# Altium PCB uku20710_com (1).PcbDoc (part 1 of 4)
Units mm, origin at the board's own origin, x right, y up, seen from the top; angles counter-clockwise.
Board outline 354.7 x 156.7 mm, 2 copper layers (Top Layer, Bottom Layer); 275 components, 514 nets, 980 pads, 578 vias.
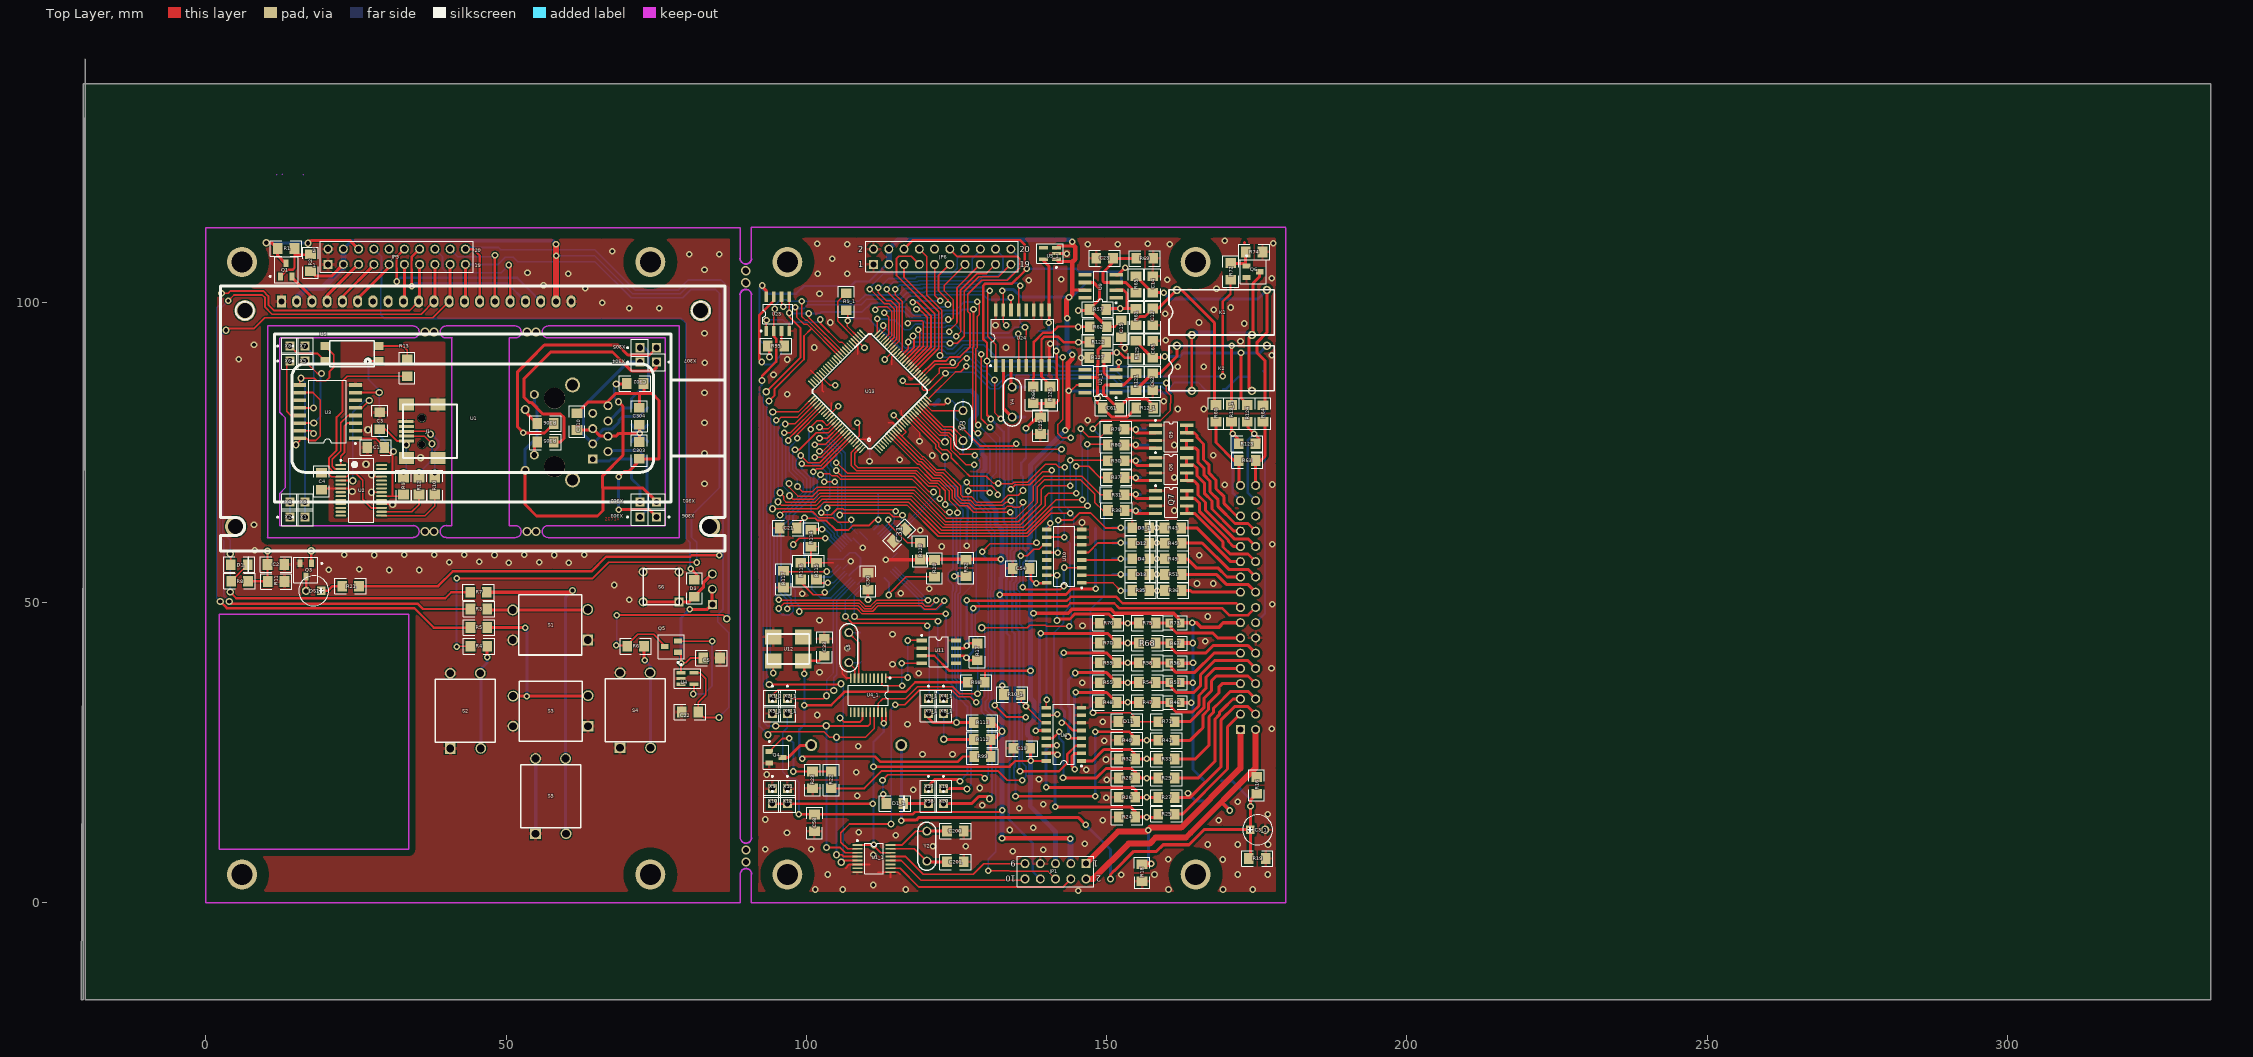
[diagram p0: Top Layer view]
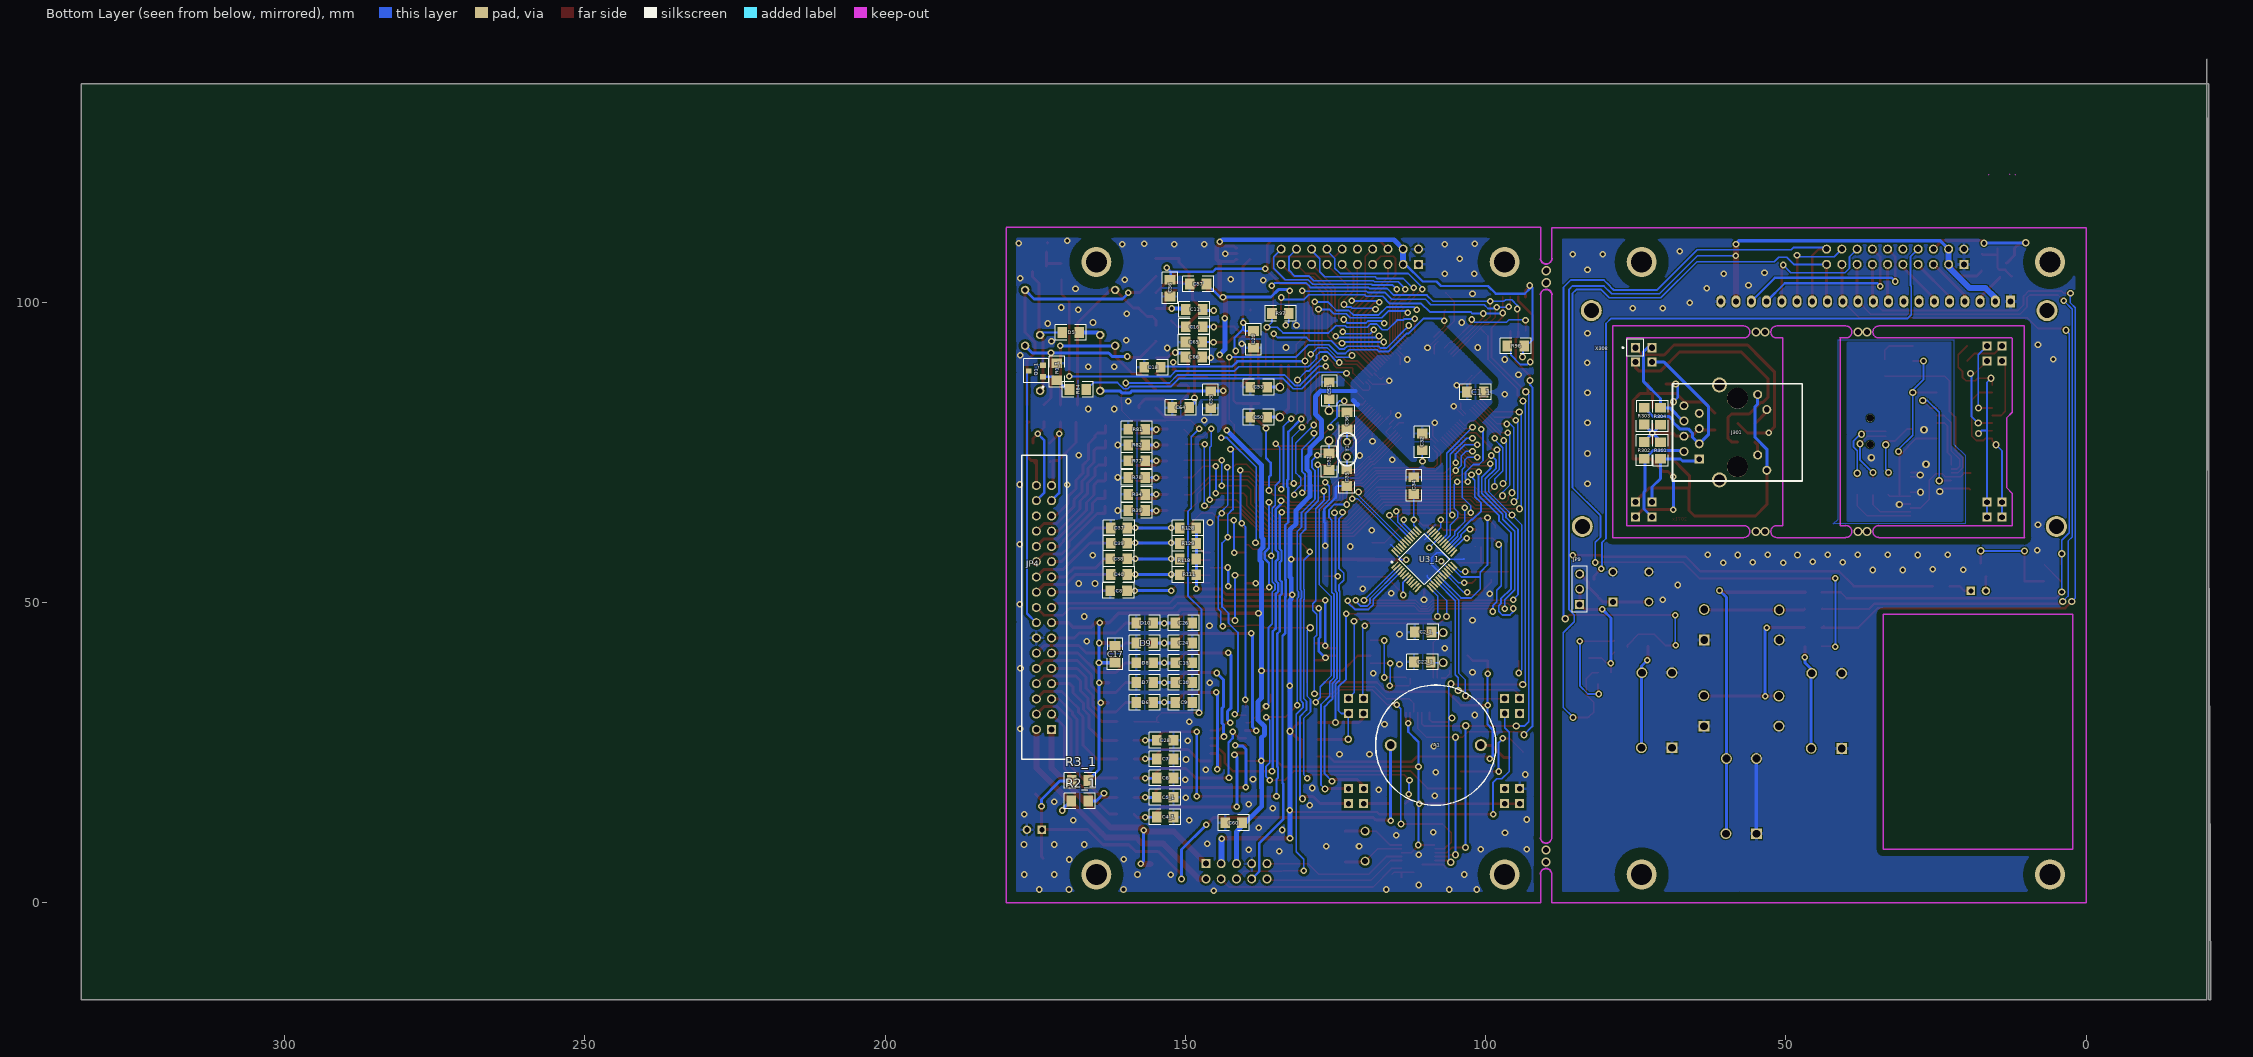
[diagram p1: Bottom Layer view, seen from below]

## Layer stack, top to bottom
Top Layer: signal copper 0.0356
Dielectric: dielectric 0.32, FR-4, Dk 4.8
Bottom Layer: signal copper 0.0356

## Board outline
-20.1,140.5 -20.1,-16.2 333.9,-16.2 333.9,136.35 -20.45,136.35 -20.45,-16.2 -20.8,-16.2

## Design rules (kind name [scope] priority, off if disabled: settings)
Clearance Keep_out_usb [OnLayer('Keep-Out Layer') vs InPoly and InNet(GND_USB)] p1: gap=0.3
Clearance Keep_out_poly [OnLayer('Keep-Out Layer') vs InPoly] p2: gap=1
Clearance Holes [InPoly vs HasPad('Free-0') Or HasPad('Free-1') Or HasPad('Free-2') Or HasPad('Free-3')] p3: gap=2
Clearance Keep_Out [OnLayer('Keep-Out Layer')] p4: gap=0.45
Clearance "Для разъёма и индикатора" [InComponent(JP5) or InComponent(U2)] p5: gap=0.3
Clearance [All] p6: gap=0.2
ComponentClearance [All] p1: gap=0.254 collisioncheckmode=0
HoleSize [All] p1: absolutevalues=TRUE maxlimit=5 minlimit=0.025 maxpercent=80.000 minpercent=20.000
PolygonConnect [InComponent(J1) and HasPad('J1-5')] p1: connectstyle=Relief reliefconductorwidth=0.3 reliefentries=4 polygonreliefangle="90 Angle"
PolygonConnect PolygonConnect_1 [All] p2: connectstyle=Relief reliefconductorwidth=0.5 reliefentries=4 polygonreliefangle="90 Angle"
RoomDefinition cpu_board [InComponentClass('cpu_board')] p1: confinementstyle=ConfineIn formatcopy=TRUE outline -43.128,-31.749 7.672,-31.749 7.672,-6.349 -43.128,-6.349
RoomDefinition ETHERNET [InComponentClass('ETHERNET')] p2: confinementstyle=ConfineIn formatcopy=TRUE outline -43.128,-31.749 7.672,-31.749 7.672,-6.349 -43.128,-6.349
RoomDefinition ANALOG-PART [InComponentClass('ANALOG-PART')] p3: confinementstyle=ConfineIn formatcopy=TRUE outline -43.128,-31.749 7.672,-31.749 7.672,-6.349 -43.128,-6.349
RoutingLayers [All] p1: top layer=Horizontal bottom layer=Vertical
RoutingVias [All] p1: holewidth=0.7 width=1.2 viastyle="Through Hole" minholewidth=0.6 minwidth=1.1 maxholewidth=0.7 maxwidth=1.2
SolderMaskExpansion [All] p1: expansion=0.102
TestPointUsage [All] p1: valid=0 allowmultiple=FALSE
Testpoint [All] p1: side=15 testpointundercomponent=TRUE minsize=1.016 maxsize=2.54 preferedsize=1.524 minholesize=0 maxholesize=1.016 preferedholesize=0.813 testpointgrid=0.025 style=1023 order=1234567890
Width [All] p1: maxlimit=2 minlimit=0.2 preferedwidth=0.254 toplayer_prefwidth=0.5 bottomlayer_prefwidth=0.5 minimp=50.000000 maximp=50.000000 favimp=50.000000
15 further rules are at their usual default settings.

## Classes and differential pairs
component class USB: C1 C3 C4 J1 R9 R10 R12 R13 U2 U3 U5 X1 X2 X3 X4 X5 X6 X7 X8
component class uku206: A? BT? C2 C5 C22 D1 D3 DS1 JP5 JP9 Q1 Q3 Q5 R1 R2 R3 R4 R5 R6 R7 R8 R11 R21 S1 S2 S3 S4 S5 S6 U1 U4 UU1 UU3 UU5 UU7 UU9
component class LAN: C302 C303 C304 C310 J301 R301 R302 R303 R304 R305 R306 X301 X302 X303 X304 X305 X306 X307 X308

## Components (designator, comment, footprint, x,y, rotation, side; value= is the part's Value field where it differs from the comment)
A1 "EFM260" Pjezo15 103.3,26.258 r0 bottom
C1 "1.0" _1206#1 28.307,75.819 r0 top
C1_1 "1.0" _1206#1 101.674,85.051 r180 bottom (schematic designator C1)
C2 "1.0" _1206#2 11.653,56.314 r180 top
C2_1 "Cap Semi" _1206#1 110.402,45.062 r180 bottom (schematic designator C2)
C3 "1.0" C3216-1206 28.957,80.27 r270 top
C3_1 "22.0 x 50" el3 173.874,12.151 r0 top (schematic designator C3)
C4 "1.0" C3216-1206 19.255,70.168 r90 top
C4_1 "1.0" _1206#3 153.374,14.251 r180 bottom (schematic designator C11)
C5 "1.0" _1206#1 84.197,40.76 r180 top
C5_1 "1.0" _1206#3 153.374,17.551 r180 bottom (schematic designator C5)
C6 "1.0" _1206#3 153.374,20.751 r180 bottom (schematic designator C7)
C7 "1.0" _1206#3 153.374,23.951 r180 bottom (schematic designator C13)
C8 "1.0" _1206#3 161.115,51.964 r0 bottom (schematic designator C?)
C9 "1.0" _1206#3 150.274,33.351 r180 bottom (schematic designator C8)
C10 "1.0" _1206#3 150.274,36.651 r180 bottom (schematic designator C16)
C11 "0.1" _1206#3 148.524,98.801 r0 bottom
C12 "1.0" _1206#3 157.674,97.551 r90 top
C13 "1.0" _1206#3 150.274,39.951 r180 bottom
C14 "1.0" _1206#3 157.674,102.951 r270 top
C15 "1.0" _1206#3 152.424,95.575 r90 top
C16 "1.0" _1206#3 148.524,95.901 r180 bottom
C17 "1.0" _1206#3 161.715,41.411 r270 bottom
C18 "1.0" _1206#3 155.474,89.151 r180 bottom
C19 "1.0" _1206#3 135.884,25.706 r0 top
C20 "1.0" _1206#3 138.659,93.804 r90 bottom
C21 "0.1" C3216-1206 96.975,62.402 r180 top
C22 "1.0" _1206#1 80.6,31.75 r180 top (schematic designator C?)
C22_1 "Cap Semi" _1206#1 110.502,40.111 r180 bottom (schematic designator C22)
C23 "0.1" _1206#3 149.662,107.328 r180 top
C24 "1.0" _1206#3 150.274,43.251 r180 bottom
C25 "1.0" _1206#3 138.974,79.451 r90 top
C26 "1.0" _1206#3 150.274,46.551 r180 bottom
C28 "1.0" _1206#3 153.374,27.051 r180 bottom
C30 "0.1" _1206#1 110.252,53.537 r270 top
C31 "0.1" _1206#1 115.479,61.201 r45 top
C32 "0.1" _1206#1 110.551,76.719 r270 bottom
C33 "0.1" _1206#1 102.976,42.561 r90 top
C34 "10,0x16" C3216-1206 111.952,69.469 r90 bottom
C35 "33" _1206#1 123.124,70.801 r90 bottom
C36 "33" _1206#1 123.074,80.251 r270 bottom
C37 "1.0" _1206#1 161.065,62.417 r0 bottom
C38 "1.0" _1206#1 161.115,57.265 r0 bottom
C39 "1.0" _1206#1 161.065,59.866 r0 bottom
C40 "1.0" _1206#1 161.065,54.665 r0 bottom
C50 "10" _1206#1 137.774,80.851 r180 bottom
C51 "10" _1206#3 126.024,85.251 r270 bottom
C52 "10" _1206#3 126.074,73.451 r90 bottom
C53 "10" _1206#1 137.774,85.851 r180 bottom
C54 "1.0" _1206#3 135.758,55.665 r0 top
C55 "1.0" _1206#3 145.774,83.751 r90 bottom
C56 "1.0" _1206#3 152.574,102.351 r90 bottom
C57 "1.0" _1206#3 147.874,103.051 r180 bottom
C58 "1.0" _1206#1 101.326,13.303 r90 top
C60 "1.0" _1206#3 141.96,13.304 r180 bottom
C61 "0.1" _1206#3 150.724,82.401 r0 top
C62 "1.0" _1206#3 157.674,86.751 r90 top
C63 "1.0" _1206#3 157.674,92.151 r270 top
C64 "1.0" _1206#3 150.774,82.451 r180 bottom
C65 "1.0" _1206#3 148.574,93.351 r180 bottom
C66 "0.1" _1206#3 148.574,90.851 r180 bottom
C200 "10" _1206#1 124.805,11.954 r180 top (schematic designator C2)
C201 "10" _1206#1 124.805,6.803 r180 top
C302 "0.1" C3216-1206 71.468,86.472 r180 top
C303 "0.1" C3216-1206 72.169,75.316 r90 top
C304 "0.1" C3216-1206 72.169,81.016 r270 top
C310 "0.1" C3216-1206 61.816,80.12 r270 top (schematic designator C301)
D1 "LL4148" _1206d#1 5.548,56.278 r180 top
D1_1 "LL4148" _1206d#2 114.729,16.504 r180 top (schematic designator D1)
D3 "LL4148" _1206d#3 81.35,52.35 r90 top
D3_1 "BZV55-C5V6" _1206d#2 155.663,62.417 r180 top (schematic designator D3)
D4 "BZV55-C5V6" _1206d#2 155.663,57.265 r180 top
D5 "LL4148" _1206d#4 169.074,94.951 r0 bottom
D6 "BZV55-C5V6" _1206d#2 156.774,33.351 r0 bottom
D7 "BZV55-C5V6" _1206d#2 156.774,36.651 r0 bottom
D8 "BZV55-C5V6" _1206d#4 156.774,39.951 r0 bottom
D9 "BZV55-C5V6" _1206d#4 156.774,43.251 r0 bottom
D10 "BZV55-C5V6" _1206d#2 156.774,46.551 r0 bottom
D11 "BZV55-C3V9" _1206d#2 153.374,30.151 r180 top
D12 "BZV55-C5V6" _1206d#2 155.663,59.866 r180 top
D13 "BZV55-C5V6" _1206d#2 155.663,54.665 r180 top
DS1 "LED0" el3 19.197,51.927 r180 top
J1 "miniUSB" USBmini 41.811,78.5 r90 top
J301 "J0011D21B" J0011D21B 58.069,78.316 r270 bottom
JP1 "PBD-10" HDR2X5 146.561,6.501 r180 top
JP4 "IDC34" IDC34M 172.274,28.851 r90 bottom
JP5 "PLHD-20" HDR2X10 20.35,106.3 r0 top
JP6 "PBD-20" HDR2X10 111.174,106.301 r0 top
JP9 "PLS-3" HDR1X3 84.321,49.663 r90 bottom
K1 "DH1A" kuan 161.674,94.551 r0 top
K2 "DH1A" kuan 161.674,85.251 r0 top
Q1 "BC856" SO-G3#1 13.353,105.4 r0 top
Q1_1 "IRLML2402" SO-G3/Z3.3 174.894,88.551 r90 bottom (schematic designator Q1)
Q3 "BC846" SO-G3#2 16.654,55.414 r180 top
Q4 "BC846" SO-G3#1 94.924,24.206 r270 top
Q5 "IRLML2402" SO-G3#1 77.5,42.65 r90 top (schematic designator Q?)
Q6 "BC846" SO-G3#1 174.394,105.076 r270 top
Q7 "IRF7103" SO-G8/Y2.2#1 160.724,66.701 r270 top
Q8 "IRF7103" SO-G8/Y2.2#2 160.724,72.201 r270 top
Q9 "IRF7103" SO-G8/Y2.2#2 160.724,77.601 r270 top
R1 "2K2" _1206#4 13.353,108.927 r0 top (schematic designator R90)
R1_1 "10K" _1206#1 171.393,88.422 r270 bottom (schematic designator R1)
R2 "7K5" _1206#4 17.404,106.577 r270 top (schematic designator R89)
R2_1 "10R" _1206#5 167.592,16.951 r0 bottom (schematic designator R2)
R3 "2K7" _1206#1 45.45,48.9 r180 top
R3_1 "10R" _1206#5 167.542,20.355 r0 bottom (schematic designator R3)
R4 "2K7" _1206#1 45.45,42.7 r180 top
R5 "2K7" _1206#1 45.45,45.8 r180 top
R6 "2K7" _1206#1 71.55,42.7 r180 top
R7 "2K7" _1206#4 45.4,51.7 r180 top (schematic designator R11)
R8 "2K7" _1206#2 5.597,53.527 r180 top
R9 "1R" _1206#1 32.908,69.367 r270 top
R9_1 "10K" _1206#1 106.65,100.075 r270 top (schematic designator R9)
R10 "20R" _1206#1 38.11,69.367 r270 top
R10_1 "2K7" _1206#1 134.284,34.659 r180 top (schematic designator R10)
R11 "10K" _1206#2 11.703,53.513 r0 top
R12 "20R" _1206#1 35.509,69.367 r270 top
R12_1 "20K" _1206#1 156.324,82.401 r180 top (schematic designator R12)
R13 "200R" _1206#1 33.508,89.072 r90 top (schematic designator R?)
R13_1 "10R" _1206#1 170.817,81.472 r270 top (schematic designator R13)
R16 "10K" _1206#1 174.974,19.551 r90 top
R17 "K10" _1206#3 128.456,41.762 r90 top
R18 "1R" _1206#3 155.889,5.001 r270 top
R19 "2K7" _1206#1 175.074,7.351 r180 top
R20 "10K" _1206#1 121.302,55.687 r90 top
R21 "270R" _1206#2 24.103,52.727 r0 top
R22 "1K0" _1206#1 104.126,20.455 r90 top
R23 "10K" _1206#1 101.025,20.455 r90 top
R24 "1K0" _1206#1 153.374,14.251 r180 top
R25 "33K" _1206#1 159.975,14.754 r0 top
R26 "1K0" _1206#1 153.374,17.551 r180 top
R27 "33K" _1206#1 159.975,17.551 r0 top
R28 "1K0" _1206#1 153.374,20.751 r180 top
R29 "33K" _1206#1 159.975,20.751 r0 top
R30 "1K0" _1206#1 151.624,73.601 r0 top
R31 "1K0" _1206#1 151.574,67.951 r0 top
R32 "1K0" _1206#1 153.374,23.951 r180 top
R33 "33K" _1206#1 159.975,23.951 r0 top
R34 "10K" _1206#1 158.074,68.001 r180 bottom
R35 "1K0" _1206#1 155.663,51.964 r180 top (schematic designator R?)
R36 "33K" _1206#1 161.115,52.014 r0 top (schematic designator R?)
R37 "1K0" _1206#1 151.624,70.801 r0 top
R38 "1K0" _1206#4 151.624,65.301 r0 top
R39 "10K" _1206#1 158.074,65.301 r180 bottom
R40 "1K0" _1206#1 153.374,27.051 r180 top
R41 "10K" _1206#1 159.975,27.051 r0 top
R43 "6K2" _1206#1 161.015,62.417 r180 top
R45 "6K2" _1206#1 161.065,59.866 r180 top
R46 "1K0" _0805 161.374,33.351 r0 top
R47 "2K7" _1206#1 156.774,33.351 r180 top
R48 "10K" _1206#1 150.274,33.351 r0 top
R49 "6K2" _1206#1 161.065,57.265 r180 top
R51 "6K2" _1206#1 161.065,54.665 r180 top
R53 "1K0" _0805 161.374,36.651 r0 top
R54 "2K7" _1206#1 156.774,36.651 r180 top
R55 "10K" _1206#1 150.274,36.651 r0 top
R56 "1K0" _0805 161.374,39.951 r0 top
R57 "20K" _1206#1 148.524,98.801 r180 top
R58 "2K7" _1206#1 156.774,39.951 r180 top
R59 "10K" _1206#1 150.274,39.951 r0 top
R60 "10R" _1206#1 168.216,81.472 r270 top
R61 "2K0" _1206#1 154.874,97.551 r90 top
R62 "20K" _1206#1 148.574,95.901 r180 top
R63 "10R" _1206#4 173.418,73.62 r180 top
R64 "10R" _1206#4 176.018,81.472 r270 top
R65 "2K0" _1206#4 154.874,102.951 r270 top
R66 "20K" _1206#1 137.774,84.551 r270 top
R67 "1K0" _0805 161.374,43.212 r0 top
R68 "2K7" _1206#1 156.774,43.251 r180 top
R69 "20K" _1206#1 156.324,107.301 r180 top
R70 "10K" _1206#1 150.274,43.251 r0 top
R71 "20K" _1206#1 159.975,30.151 r0 top
R72 "1K0" _1206#4 170.667,105.127 r90 top
R73 "1K0" _0805 161.374,46.613 r0 top
R74 "10K" _1206#1 174.544,108.377 r180 top
R75 "2K7" _1206#1 156.774,46.551 r180 top
R76 "10K" _1206#4 150.274,46.551 r0 top
R77 "10K" _1206#1 158.074,73.601 r180 bottom
R78 "10K" _1206#1 158.074,70.801 r180 bottom
R79 "1K0" _1206#1 151.574,78.851 r0 top
R80 "1K0" _1206#1 151.574,76.251 r0 top
R81 "10K" _1206#1 158.074,78.851 r180 bottom
R82 "10K" _1206#1 158.074,76.251 r180 bottom
R84 "1K0" _1206#3 167.892,85.472 r0 bottom
R92 "1K0" _1206#1 126.556,55.751 r90 top
R95 "2K7" _1206#1 94.924,92.701 r180 top
R96 "2K7" _1206#1 94.974,92.701 r0 bottom
R97 "1K0" _1206#1 134.158,98.126 r180 bottom
R98 "1R" _1206#1 128.282,36.709 r0 top
R99 "1R" _1206#1 129.333,24.356 r0 top
R111 "33K" _1206#1 149.574,54.615 r0 bottom (schematic designator R?)
R112 "2K2" _1206#1 129.307,27.208 r0 top
R113 "2K2" _1206#1 129.307,30.009 r0 top
R114 "2K2" _1206#1 100.776,60.687 r270 top
R115 "2K2" _1206#1 101.652,55.237 r90 top
R116 "2K2" _1206#1 99.052,55.237 r90 top
R117 "4K87" _1206#1 96.174,53.899 r90 top
R118 "33K" _1206#1 149.574,57.215 r0 bottom (schematic designator R?)
R120 "2K2" _1206#1 118.952,58.537 r270 top (schematic designator R100)
R121 "2K0" _1206#1 154.874,86.751 r90 top (schematic designator R101)
R122 "20K" _1206#1 148.524,93.351 r180 top (schematic designator R102)
R123 "10R" _1206#1 173.368,76.42 r180 top (schematic designator R103)
R124 "10R" _1206#1 173.418,81.472 r270 top (schematic designator R104)
R125 "2K0" _1206#1 154.874,92.151 r270 top (schematic designator R105)
R126 "20K" _1206#1 140.574,84.551 r270 top (schematic designator R106)
R127 "20K" _1206#1 148.524,90.801 r0 top (schematic designator R107)
R128 "33K" _1206#1 149.574,62.401 r0 bottom (schematic designator R?)
R129 "33K" _1206#1 149.574,59.816 r0 bottom (schematic designator R?)
R301 "51R" _1206#1 70.869,75.316 r90 bottom
R302 "51R" _1206#1 73.569,75.316 r270 bottom
R303 "51R" _1206#1 73.569,81.016 r270 bottom
R304 "51R" _1206#1 70.869,81.016 r90 bottom
R305 "K10" _1206#1 56.569,76.716 r0 top
R306 "K10" _1206#1 56.569,79.816 r0 top
S1 "SWT-9" SWT-9 63.6,43.75 r180 top (schematic designator S2)
S2 "SWT-9" SWT-9 40.7,25.7 r90 top (schematic designator S4)
S3 "SWT-9" SWT-9 63.65,29.4 r180 top (schematic designator S1)
S4 "SWT-9" SWT-9 68.97,25.8 r90 top (schematic designator S5)
S5 "SWT-9" SWT-9 54.9,11.5 r90 top (schematic designator S3)
S6 "SWT-6" SWT-6 78.8,50.1 r180 top
U1 "AG1232G" AG1232G 44.45,80.7 r0 top (schematic designator U4)
U1_1 "SC16IS740" TSSO5X6-G16 111.252,7.353 r270 top (schematic designator U1)
U2 "FT232R" SOP65P780-28L 25.857,68.667 r0 top
U2_1 "OP07CS" SO-G8#1 148.974,86.851 r90 top (schematic designator U2)
U3 "ISO7231" SO-G16/D10.4 20.255,81.771 r90 top
U3_1 "DP8348C" F-QFP7X7-G48/N 110.202,57.237 r135 bottom (schematic designator U3)
U4 "TPS3823" SO-G5/P.95 80.2,37.35 r270 top (schematic designator U?)
U4_1 "MCP2515" TSSO6X6-G20/D6.6 110.302,34.56 r180 top (schematic designator U4)
U5 "FOD817ASD" FOD817ASD 28.807,90.223 r90 top
U5_1 "TPS76333" SO-G5/P.95 140.558,108.101 r90 top (schematic designator U5)
U6 "MC14051BD" SO-G16/C5.85#1 142.874,28.051 r90 top
U9 "OP07CS" SO-G8#2 148.974,102.651 r90 top
U10 "MC14051BD" SO-G16/C5.85#2 142.924,57.701 r90 top
U11 "TJA1050" SO-G8/D5 122.055,41.762 r270 top
U12 "KXO-97-50MGz" KXO-97 96.974,42.261 r180 top
U13 "LPC1766FBD100" LPC2368 110.574,85.151 r45 top
U23 "25LC640" SO-G8/D5 95.224,98.051 r0 top
U24 "AD7705" SO-G16/D10.4 135.974,94.051 r0 top
X1 "" PIN1#1 16.5,64.2 r90 top
X1_1 "" PIN1#2 94.322,34.001 r0 top (schematic designator X1)
X2 "" PIN1#1 14,64.2 r90 top
X2_1 "" PIN1#2 96.822,34.001 r0 top (schematic designator X2)
X3 "" PIN1#1 16.5,66.7 r90 top
X3_1 "" PIN1#2 120.322,34.001 r0 top (schematic designator X3)
X4 "" PIN1#1 14,66.7 r90 top
X4_1 "" PIN1#1 122.822,34.001 r0 top (schematic designator X4)
X5 "" PIN1#1 16.5,90.2 r90 top
X5_1 "" PIN1#1 94.322,31.501 r0 top (schematic designator X5)
X6 "" PIN1#1 14,90.2 r90 top
X6_1 "" PIN1#1 96.822,31.501 r0 top (schematic designator X6)
X7 "" PIN1#1 16.5,92.7 r90 top
X7_1 "" PIN1#1 120.322,31.501 r0 top (schematic designator X7)
X8 "" PIN1#1 14,92.7 r90 top
X8_1 "" PIN1#1 122.822,31.501 r0 top (schematic designator X8)
X9 "" PIN1#3 94.322,19.001 r0 top
X10 "" PIN1#3 94.322,16.501 r0 top
X11 "" PIN1#3 96.822,19.001 r0 top
X12 "" PIN1#3 96.822,16.501 r0 top
X17 "" PIN1#3 120.322,19.001 r0 top
X18 "" PIN1#3 120.322,16.501 r0 top
X19 "" PIN1#3 122.822,19.001 r0 top
X20 "" PIN1#3 122.822,16.501 r0 top
X301 "" PIN1#2 75.069,66.716 r270 top
X302 "" PIN1#2 72.269,66.716 r90 top
X303 "" PIN1#2 72.269,64.216 r90 top
X304 "" PIN1#2 72.269,90.016 r90 top
X305 "" PIN1#2 72.269,92.416 r90 top
X306 "" PIN1#2 75.069,64.216 r270 top
X307 "" PIN1#2 75.069,90.016 r270 top
X308 "" PIN1#2 75.069,92.416 r90 bottom
Y1 "32768" QWARZ2 123.079,76.75 r270 bottom
Y2 "10MGz" QWARZ1 120.054,6.903 r90 top
Y3 "10MGz" QWARZ1 126.074,81.951 r270 top
Y4 "4,9152MGz" QWARZ1 134.274,80.851 r90 top
Y5 "8MGz" QWARZ1 107.051,39.961 r90 top

## Footprints (in the part's own frame and the unit in brackets; to place one, negate y for a bottom-side part, rotate by r counter-clockwise, add the part's x,y. Pads: shape width x height; smd on the part's side, far side on the other; paste and mask are expansions set on the pad)
_0805 [mm]
  rect 1.3x1.5 smd: 1(-0.942,-0.005) 2(0.958,-0.005)
  silkscreen extent -1.99,-1.16 2.01,1.14
_1206#1 [mm]
  rect 1.6x1.8 smd: 1(-1.412,-0.007) 2(1.388,-0.007)
  silkscreen extent -2.61,-1.31 2.59,1.29
_1206#2 [mm]
  rect 1.6x1.8 smd: 1(-1.409,-0.014) 2(1.391,-0.015)
  silkscreen extent -2.61,-1.31 2.59,1.29
_1206#3 [mm]
  rect 1.6x1.8 smd: 1(-1.397,0.003) 2(1.403,0.003)
  silkscreen extent -2.6,-1.3 2.6,1.3
_1206#4 [mm]
  rect 1.6x1.8 smd: 1(-1.4,0) 2(1.4,0)
  silkscreen extent -2.6,-1.3 2.6,1.3
_1206#5 [mm]
  rect 1.6x1.8 smd: 1(-1.41,0.006) 2(1.39,0.006)
  silkscreen extent -2.61,-1.29 2.59,1.31
_1206d#1 [mm]
  rect 1.6x1.8 smd: 1(1.403,-0.017) 2(-1.397,-0.017)
  silkscreen extent -2.6,-1.32 2.6,1.28
_1206d#2 [mm]
  rect 1.6x1.8 smd: 1(1.395,-0.009) 2(-1.405,-0.009)
  silkscreen extent -2.6,-1.31 2.6,1.29
_1206d#3 [mm]
  rect 1.6x1.8 smd: 1(1.405,0.012) 2(-1.395,0.012)
  silkscreen extent -2.6,-1.29 2.6,1.31
_1206d#4 [mm]
  rect 1.6x1.8 smd: 1(1.4,0) 2(-1.4,0)
  silkscreen extent -2.6,-1.3 2.6,1.3
AG1232G [mm]
  rect 1.5x2 hole 0.95: 1(-31.877,19.431)
  oval 1.5x2 hole 0.95: 2(-29.337,19.431) 3(-26.797,19.431) 4(-24.257,19.431) 5(-21.717,19.431) 6(-19.177,19.431) 7(-16.637,19.431) 8(-14.097,19.431) 9(-11.557,19.431) 10(-9.017,19.431) 11(-6.477,19.431) 12(-3.937,19.431) 13(-1.397,19.431) 14(1.143,19.431) 15(3.683,19.431) 16(6.223,19.431) 17(8.763,19.431) 18(11.303,19.431) 19(13.843,19.431) 20(16.383,19.431)
  silkscreen extent -42.04,-22.1 41.96,21.97
C3216-1206 [mm]
  rect 1.6x1.8 smd: 1(-1.4,0) 2(1.4,0)
  silkscreen extent -2.6,-1.3 2.6,1.3
el3 [mm]
  rect 1.4x1.4 hole 0.85: 1(0.011,-0.008)
  round 1.4 hole 0.85: 2(2.511,-0.008)
  silkscreen extent -1.23,-2.51 3.76,2.49
F-QFP7X7-G48/N [mm]
  rect 1.55x0.3 smd: 1(-4.192,2.749) 2(-4.192,2.249) 3(-4.192,1.749) 4(-4.192,1.249) 5(-4.192,0.749) 6(-4.192,0.249) 7(-4.192,-0.251) 8(-4.192,-0.751) 9(-4.192,-1.251) 10(-4.192,-1.751) 11(-4.192,-2.251) 12(-4.192,-2.751) 25(4.158,-2.751) 26(4.158,-2.251) 27(4.158,-1.751) 28(4.158,-1.251) 29(4.158,-0.751) 30(4.158,-0.251) 31(4.158,0.249) 32(4.158,0.749) 33(4.158,1.249) 34(4.158,1.749) 35(4.158,2.249) 36(4.158,2.749)
  rect 0.3x1.55 smd: 13(-2.767,-4.176) 14(-2.267,-4.176) 15(-1.767,-4.176) 16(-1.267,-4.176) 17(-0.767,-4.176) 18(-0.267,-4.176) 19(0.233,-4.176) 20(0.733,-4.176) 21(1.233,-4.176) 22(1.733,-4.176) 23(2.233,-4.176) 24(2.733,-4.176) 37(2.733,4.174) 38(2.233,4.174) 39(1.733,4.174) 40(1.233,4.174) 41(0.733,4.174) 42(0.233,4.174) 43(-0.267,4.174) 44(-0.767,4.174) 45(-1.267,4.174) 46(-1.767,4.174) 47(-2.267,4.174) 48(-2.767,4.174)
  silkscreen extent -4.32,-3 2.98,3.57
FOD817ASD [mm]
  rect 1.3x1.5 smd: 1(0,0) 2(2.5,0) 3(2.5,9) 4(0,9)
  silkscreen extent -0.97,0.75 3.4,8.22
HDR1X3 [mm]
  rect 1.5x1.5 hole 1: 1(0,0)
  round 1.5 hole 1: 2(2.54,0) 3(5.08,0)
  silkscreen extent -1.27,-1.27 6.35,1.27
HDR2X5 [mm]
  rect 1.5x1.5 hole 1: 1(0,0)
  round 1.5 hole 1: 2(0,2.54) 3(2.54,0) 4(2.54,2.54) 5(5.08,0) 6(5.08,2.54) 7(7.62,0) 8(7.62,2.54) 9(10.16,0) 10(10.16,2.54)
  silkscreen extent -1.27,-1.27 11.43,3.81
HDR2X10 [mm]
  rect 1.5x1.5 hole 1: 1(0,0)
  round 1.5 hole 1: 2(0,2.54) 3(2.54,0) 4(2.54,2.54) 5(5.08,0) 6(5.08,2.54) 7(7.62,0) 8(7.62,2.54) 9(10.16,0) 10(10.16,2.54) 11(12.7,0) 12(12.7,2.54) 13(15.24,0) 14(15.24,2.54) 15(17.78,0) 16(17.78,2.54) 17(20.32,0) 18(20.32,2.54) 19(22.86,0) 20(22.86,2.54)
  silkscreen extent -1.27,-1.27 24.13,3.81
IDC34M [mm]
  rect 1.5x1.5 hole 1: 1(0,0)
  round 1.5 hole 1: 2(0,2.54) 3(2.54,0) 4(2.54,2.54) 5(5.08,0) 6(5.08,2.54) 7(7.62,0) 8(7.62,2.54) 9(10.16,0) 10(10.16,2.54) 11(12.7,0) 12(12.7,2.54) 13(15.24,0) 14(15.24,2.54) 15(17.78,0) 16(17.78,2.54) 17(20.32,0) 18(20.32,2.54) 19(22.86,0) 20(22.86,2.54) 21(25.4,0) 22(25.4,2.54) 23(27.94,0) 24(27.94,2.54) 25(30.48,0) 26(30.48,2.54) 27(33.02,0) 28(33.02,2.54) 29(35.56,0) 30(35.56,2.54) 31(38.1,0) 32(38.1,2.54) 33(40.64,0) 34(40.64,2.54)
  silkscreen extent -5,-2.5 45.7,5
J0011D21B [mm]
  round 2.5 hole 1.8: 0(-7.9,-3) 0(7.9,-3)
  round 3.5 hole 3.5: 0(-5.7,0) 0(5.7,0)
  rect 1.5x1.5 hole 0.95: 1(4.445,-6.35)
  round 1.5 hole 0.95: 2(3.175,-8.9) 3(1.905,-6.35) 4(0.635,-8.9) 5(-0.635,-6.35) 6(-1.905,-8.9) 7(-3.175,-6.35) 8(-4.445,-8.9) 9(6.31,4.9) 10(3.77,3.38) 11(-3.8,4.9) 12(-6.31,3.38)
  silkscreen extent -8.1,-10.8 8.1,10.8
kuan [mm]
  round 1.4 hole 0.85: 1(15.006,7.49) 3(0.006,7.49) 4(2.506,-0.01) 5(12.506,-0.01)
  silkscreen extent -1.34,-0.01 16.21,7.49
KXO-97 [mm]
  rect 2.7x2.5 smd: 1(-2.5,-2) 2(2.5,-2) 3(2.5,2) 4(-2.5,2)
  silkscreen extent -3.5,-2.5 3.5,2.5
LPC2368 [mm]
  rect 0.25x1.5 smd: 1(-6,-7.775)
  oval 0.25x1.5 smd: 2(-5.5,-7.75) 3(-5,-7.75) 4(-4.5,-7.75) 5(-4,-7.75) 6(-3.5,-7.75) 7(-3,-7.75) 8(-2.5,-7.75) 9(-2,-7.75) 10(-1.5,-7.75) 11(-1,-7.75) 12(-0.5,-7.75) 13(0,-7.75) 14(0.5,-7.75) 15(1,-7.75) 16(1.5,-7.75) 17(2,-7.75) 18(2.5,-7.75) 19(3,-7.75) 20(3.5,-7.75) 21(4,-7.75) 22(4.5,-7.75) 23(5,-7.75) 24(5.5,-7.75) 25(6,-7.75) 51(6,7.75) 52(5.5,7.75) 53(5,7.75) 54(4.5,7.75) 55(4,7.75) 56(3.5,7.75) 57(3,7.75) 58(2.5,7.75) 59(2,7.75) 60(1.5,7.75) 61(1,7.75) 62(0.5,7.75) 63(0,7.75) 64(-0.5,7.75) 65(-1,7.75) 66(-1.5,7.75) 67(-2,7.75) 68(-2.5,7.75) 69(-3,7.75) 70(-3.5,7.75) 71(-4,7.75) 72(-4.5,7.75) 73(-5,7.75) 74(-5.5,7.75) 75(-6,7.75)
  oval 1.5x0.25 smd: 26(7.75,-6) 27(7.75,-5.5) 28(7.75,-5) 29(7.75,-4.5) 30(7.75,-4) 31(7.75,-3.5) 32(7.75,-3) 33(7.75,-2.5) 34(7.75,-2) 35(7.75,-1.5) 36(7.75,-1) 37(7.75,-0.5) 38(7.75,0) 39(7.75,0.5) 40(7.75,1) 41(7.75,1.5) 42(7.75,2) 43(7.75,2.5) 44(7.75,3) 45(7.75,3.5) 46(7.75,4) 47(7.75,4.5) 48(7.75,5) 49(7.75,5.5) 50(7.75,6) 76(-7.75,6) 77(-7.75,5.5) 78(-7.75,5) 79(-7.775,4.475) 80(-7.75,4) 81(-7.75,3.5) 82(-7.75,3) 83(-7.75,2.5) 84(-7.75,2) 85(-7.75,1.5) 86(-7.75,1) 87(-7.75,0.5) 88(-7.75,0) 89(-7.75,-0.5) 90(-7.75,-1) 91(-7.75,-1.5) 92(-7.75,-2) 93(-7.75,-2.5) 94(-7.775,-3.025) 95(-7.75,-3.5) 96(-7.75,-4) 97(-7.75,-4.5) 98(-7.75,-5) 99(-7.75,-5.5) 100(-7.75,-6)
  silkscreen extent -6.93,-6.93 6.93,6.93
PIN1#1 [mm]
  rect 1.5x1.5 hole 0.95: 1(0,0)
  silkscreen extent -1.4,-1.4 1.4,2.17
PIN1#2 [mm]
  rect 1.5x1.5 hole 1: 1(0,0)
  silkscreen extent -1.4,-1.4 1.4,2.17
PIN1#3 [mm]
  rect 1.5x1.5 hole 0.9: 1(0,0)
  silkscreen extent -1.4,-1.4 1.4,2.17
Pjezo15 [mm]
  round 2 hole 1.3: 1(-2.503,0.012) 2(12.497,0.012)
  silkscreen extent -5.02,-10 15.01,10.02
QWARZ1 [mm]
  round 1.5 hole 1: 1(0.008,0) 2(5.008,0)
  silkscreen extent -1.49,-1.5 6.51,1.5
QWARZ2 [mm]
  round 1.3 hole 0.85: 1(0.001,0.005) 2(2.501,0.005)
  silkscreen extent -1.5,-1.5 4,1.5
SO-G3#1 [mm]
  rect 0.85x1.3 smd: 1(-0.948,-1.102) 2(0.952,-1.102) 3(0.002,1.098)
  silkscreen extent -2.77,-2.15 2,2.15
SO-G3#2 [mm]
  rect 0.85x1.3 smd: 1(-0.944,-1.105) 2(0.956,-1.105) 3(0.006,1.095)
  silkscreen extent -2.77,-2.16 2.01,2.14
SO-G3/Z3.3 [mm]
  rect 0.9x0.95 smd: 1(-0.954,-1.179) 2(0.946,-1.179) 3(-0.004,1.171)
  silkscreen extent -2.78,-2.05 2,2.05
SO-G5/P.95 [mm]
  rect 0.55x1.45 smd: 1(-0.95,-1.075) 2(0,-1.075) 3(0.95,-1.075) 4(0.95,1.075) 5(-0.95,1.075)
  silkscreen extent -2.42,-2.2 1.65,2.2
SO-G8#1 [mm]
  rect 0.6x2.2 smd: 1(-1.905,-2.6) 2(-0.635,-2.6) 3(0.635,-2.6) 4(1.905,-2.6) 5(1.905,2.6) 6(0.635,2.6) 7(-0.635,2.6) 8(-1.905,2.6)
  silkscreen extent -2.88,-2.72 2.5,1.1
SO-G8#2 [mm]
  rect 0.6x2.2 smd: 1(-1.902,-2.611) 2(-0.632,-2.611) 3(0.638,-2.611) 4(1.908,-2.611) 5(1.908,2.589) 6(0.638,2.589) 7(-0.632,2.589) 8(-1.902,2.589)
  silkscreen extent -2.88,-2.74 2.5,1.09
SO-G8/D5 [mm]
  rect 0.6x1.7 smd: 1(-1.905,-2.85) 2(-0.635,-2.85) 3(0.635,-2.85) 4(1.905,-2.85) 5(1.905,2.85) 6(0.635,2.85) 7(-0.635,2.85) 8(-1.905,2.85)
  silkscreen extent -2.88,-2.97 2.5,1.6
SO-G8/Y2.2#1 [mm]
  rect 0.55x2.2 smd: 1(-1.91,-2.588) 2(-0.64,-2.588) 3(0.63,-2.588) 4(1.9,-2.588) 5(1.9,2.612) 6(0.63,2.612) 7(-0.64,2.612) 8(-1.91,2.612)
  silkscreen extent -2.86,-2.71 2.49,1.11
SO-G8/Y2.2#2 [mm]
  rect 0.55x2.2 smd: 1(-1.905,-2.6) 2(-0.635,-2.6) 3(0.635,-2.6) 4(1.905,-2.6) 5(1.905,2.6) 6(0.635,2.6) 7(-0.635,2.6) 8(-1.905,2.6)
  silkscreen extent -2.85,-2.72 2.5,1.1
SO-G16/C5.85#1 [mm]
  rect 0.6x1.55 smd: 1(-4.452,-2.93) 2(-3.182,-2.93) 3(-1.912,-2.93) 4(-0.642,-2.93) 5(0.628,-2.93) 6(1.898,-2.93) 7(3.168,-2.93) 8(4.438,-2.93) 9(4.438,2.92) 10(3.168,2.92) 11(1.898,2.92) 12(0.628,2.92) 13(-0.642,2.92) 14(-1.912,2.92) 15(-3.182,2.92) 16(-4.452,2.92)
  silkscreen extent -5.4,-3.05 4.99,1.75
SO-G16/C5.85#2 [mm]
  rect 0.6x1.55 smd: 1(-4.445,-2.925) 2(-3.175,-2.925) 3(-1.905,-2.925) 4(-0.635,-2.925) 5(0.635,-2.925) 6(1.905,-2.925) 7(3.175,-2.925) 8(4.445,-2.925) 9(4.445,2.925) 10(3.175,2.925) 11(1.905,2.925) 12(0.635,2.925) 13(-0.635,2.925) 14(-1.905,2.925) 15(-3.175,2.925) 16(-4.445,2.925)
  silkscreen extent -5.39,-3.05 5,1.75
SO-G16/D10.4 [mm]
  rect 0.6x2.15 smd: 1(-4.445,-4.625) 2(-3.175,-4.625) 3(-1.905,-4.625) 4(-0.635,-4.625) 5(0.635,-4.625) 6(1.905,-4.625) 7(3.175,-4.625) 8(4.445,-4.625) 9(4.445,4.625) 10(3.175,4.625) 11(1.905,4.625) 12(0.635,4.625) 13(-0.635,4.625) 14(-1.905,4.625) 15(-3.175,4.625) 16(-4.445,4.625)
  silkscreen extent -5.42,-4.75 5.2,3.15
SOP65P780-28L [mm]
  oval 1.8x0.35 smd: 1(-3.396,4.231) 2(-3.396,3.581) 3(-3.396,2.931) 4(-3.396,2.281) 5(-3.396,1.631) 6(-3.396,0.981) 7(-3.396,0.331) 8(-3.396,-0.319) 9(-3.396,-0.969) 10(-3.396,-1.619) 11(-3.396,-2.269) 12(-3.396,-2.919) 13(-3.396,-3.569) 14(-3.396,-4.219) 15(3.404,-4.219) 16(3.404,-3.569) 17(3.404,-2.919) 18(3.404,-2.269) 19(3.404,-1.619) 20(3.404,-0.969) 21(3.404,-0.319) 22(3.404,0.331) 23(3.404,0.981) 24(3.404,1.631) 25(3.404,2.281) 26(3.404,2.931) 27(3.404,3.581) 28(3.404,4.231)
  silkscreen extent -3.52,-5.29 2.1,5.31
SWT-6 [mm]
  rect 1.5x1.5 hole 1: 1(-0.009,-0.001)
  round 1.5 hole 1: 1(5.991,-0.001) 2(-0.009,-5.001) 2(5.991,-5.001)
  silkscreen extent -0.01,-5.5 5.99,0.5
SWT-9 [mm]
  rect 1.8x1.8 hole 1.3: 1(0,0)
  round 1.8 hole 1.3: 1(12.5,0) 2(0,-5.08) 2(12.5,-5)
  silkscreen extent 1,-7.5 11.5,2.5
TSSO5X6-G16 [mm]
  rect 0.3x1.65 smd: 1(-2.275,-2.775) 2(-1.625,-2.775) 3(-0.975,-2.775) 4(-0.325,-2.775) 5(0.325,-2.775) 6(0.975,-2.775) 7(1.625,-2.775) 8(2.275,-2.775) 9(2.275,2.775) 10(1.625,2.775) 11(0.975,2.775) 12(0.325,2.775) 13(-0.325,2.775) 14(-0.975,2.775) 15(-1.625,2.775) 16(-2.275,2.775)
  silkscreen extent -3.1,-2.9 2.55,1.55
TSSO6X6-G20/D6.6 [mm]
  rect 0.3x1.6 smd: 1(-2.925,-2.85) 2(-2.275,-2.85) 3(-1.625,-2.85) 4(-0.975,-2.85) 5(-0.325,-2.85) 6(0.325,-2.85) 7(0.975,-2.85) 8(1.625,-2.85) 9(2.275,-2.85) 10(2.925,-2.85) 11(2.925,2.85) 12(2.275,2.85) 13(1.625,2.85) 14(0.975,2.85) 15(0.325,2.85) 16(-0.325,2.85) 17(-0.975,2.85) 18(-1.625,2.85) 19(-2.275,2.85) 20(-2.925,2.85)
  silkscreen extent -3.75,-2.97 3.3,1.65
USBmini [mm]
  round 1.2 hole 1.2: 0(-2.2,5.85) 0(2.2,5.85)
  rect 0.5x2.5 smd: 1(-1.6,8.43) 2(-0.8,8.43) 3(0,8.43) 4(0.8,8.43) 5(1.6,8.45)
  rect 2x2.5 smd: 6(-4.45,8.43) 6(-4.45,3.158) 6(4.45,8.43) 6(4.45,3.158)
  silkscreen extent -4.45,0 4.45,9

## Part data
A1: library part PJEZ0
C1 C3 C4 C4_1 C5_1 C6 C7 C8 C9 C10 C11 C12 C13 C14 C15 C16 C17 C18 C19 C20 C21 C23 C24 C25 C26 C30 C31 C32 C33 C35 C36 C50 C51 C52 C53 C54 C55 C56 C57 C60 C61 C62 C63 C64 C65 C66 C302 C303 C304 C310: library part "Cap Semi", "Capacitor (Semiconductor SIM Model)"
C1_1 C2 C5 C22 C28 C37 C38 C39 C40 C58 C200 C201: library part "Cap Semi", "Capacitor"
C2_1 C22_1: "Capacitor (Semiconductor SIM Model)"
C3_1 C34: library part "Cap Pol1", "Polarized Capacitor (Radial)"
D1 D1_1: library part Diode, "Diode"
D3: library part Diode, "Default Diode"
D3_1 D4 D5 D6 D7 D8 D9 D10 D11 D12 D13: library part "D Zener", "Zener Diode"
DS1: "Typical INFRARED GaAs LED"
J1: library part "Header 6", "Header, 6-Pin"
JP1: library part "Header 5X2", "Header, 5-Pin, Dual row"
JP4: library part MHDR2X13, "Header, 13-Pin, Dual row"
JP5 JP6: library part "Header 10X2", "Header, 10-Pin, Dual row"
JP9: library part "Header 3", "Header, 3-Pin"
K1 K2: library part BS115, "Single-Pole Dual-Throw Relay"
Q1: library part GT109
Q1_1 Q5: "HEXFET Power MOSFET"
Q3: library part GT122, "Bipolar transistor"
Q4 Q6: library part GT122
Q7 Q8 Q9: library part IRF7301, "HEXFET Power MOSFET"
R1 R1_1 R2 R2_1 R3 R3_1 R4 R5 R6 R7 R8 R9_1 R10_1 R11 R12_1 R13_1 R16 R17 R18 R19 R20 R21 R22 R23 R24 R25 R26 R27 R28 R29 R30 R31 R32 R33 R34 R35 R36 R37 R38 R39 R40 R41 R43 R45 R46 R47 R48 R49 R51 R53 R54 R55 R56 R57 R58 R59 R60 R61 R62 R63 R64 R65 R66 R67 R68 R69 R70 R71 R72 R73 R74 R75 R76 R77 R78 R79 R80 R81 R82 R84 R92 R95 R96 R97 R98 R99 R111 R112 R113 R114 R115 R116 R117 R118 R120 R121 R122 R123 R124 R125 R126 R127 R128 R129 R301 R302 R303 R304 R305 R306: library part Res2, "Resistor"
R9 R10 R12 R13: library part RES
S1 S2 S3 S4 S5: "Switch"
S6: library part SWT-9, "Switch"
U2_1 U9: "Ultra-Low Offset Voltage Operational Amplifier"
U4: "Reset IC"
U5: library part F00817ASD
U5_1: library part LP2980AIM5-3.3, "Micropower SOT, 50 mA Ultra Low-Dropout Regulator"
U6 U10: "8-Channel Analog Multiplexer/Demultiplexer"
U12: library part KXO-97
U13: library part LPC2368FBD100
X1 X1_1 X2 X2_1 X3 X3_1 X4 X4_1 X5 X5_1 X6 X6_1 X7 X7_1 X8 X8_1 X9 X10 X11 X12 X17 X18 X19 X20 X301 X302 X303 X304 X305 X306 X307 X308: library part Socket, "Socket"
Y1 Y2 Y3 Y4 Y5: library part XTAL, "Crystal Oscillator"

## Free pads (board coordinates)
  round 5 hole 3.5: 0(6,4.7) 0(6,106.7) 0(74,4.7) 0(74,106.7) 0(96.824,106.701) 0(96.824,4.701) 0(164.824,4.701) 0(164.824,106.701)
  round 3.5 hole 2.5: 51(6.5,98.6) 52(4.95,62.65) 53(83.9,62.65) 54(82.4,98.6)

## Via types
v1: diameter 1.1, hole 0.6, Top Layer to Bottom Layer, 491 vias
v2: diameter 1.2, hole 0.7, Top Layer to Bottom Layer, 63 vias
v3: diameter 1.5, hole 1, Top Layer to Bottom Layer, 20 vias
v4: diameter 1.27, hole 0.7, Top Layer to Bottom Layer, 3 vias
v5: diameter 1.2, hole 0.6, Top Layer to Bottom Layer, 1 vias

## Nets (pads, with @x,y where several pads share a name; then routed paths per layer and width w, separated by ;. In a path a pad name is that pad's centre, name@x,y a point inside that pad or via, vN(x,y) a via of type N, cw(c..) or ccw(c..) an arc to the next point about the centre after c; other vN are vias at no path point)
+1.8V: 
+3.3V: 
+3V3: 
+5V: 
+5V_IZ: 
+IAKB1: 
+IAKB2: 
+UOUT: 
-5V: 
-5V_IZ: 
-IAKB1: 
-IAKB2: 
-UOUT: 
BAT: 
CANH: 
CANL: 
DB0: JP5.13 R5.2 U1.10 | length 140.3
  Top Layer w0.3: v1@2.651,101.476 v1(2.598,101.476) 3.701,101.476 4.101,101.876 9.552,101.876 10.403,101.025 10.403,99.548 10.941,99.009 ; 10.5,99.45 11.35,98.6 33.902,98.6 U1.10@35.433,100.131 ; R5.2@43.925,45.826 43.944,45.807 R5.2@43.95,45.8
  Top Layer w0.4: v2(2.401,50.163) 3.501,49.062 4.651,49.062 4.601,49.062 ; 4.351,49.062 34.698,49.062 37.953,45.807 R5.2@44.063,45.807 ; R5.2@43.688,46.062 R5.2@43.925,45.826
  Top Layer w0.5: U1.10@35.433,100.131 35.433,100.133 35.59,100.29 JP5.13@35.59,106.3
  Bottom Layer w0.25: v2(2.401,50.163) 1.8,50.763 1.8,99.075 2.598,99.872 v1(2.598,101.476) 2.598,100.072
DB1: JP5.15 R3.2 U1.11 | length 140.2
  Top Layer w0.3: v1(3.751,100.275) 4.676,101.2 9.376,101.2 9.85,100.725 9.85,99.15 11,98 35.842,98 U1.11@37.973,100.131 ; R3.2@43.861,49.012 R3.2@44.011,49.012
  Top Layer w0.4: v2(3.901,50.163) 4.301,49.763 5.051,49.763 ; 4.651,49.763 35.297,49.763 36.153,48.907 R3.2@44.063,48.907
  Top Layer w0.5: U1.11@37.973,100.131 38.13,100.288 JP5.15@38.13,106.3
  Bottom Layer w0.25: 2.298,61.566 2.298,98.825 ; 2.298,63.266 2.298,60.918 3.001,60.215 3.001,51.063 v2@3.951,50.113 ; 2.298,96.974 2.298,98.822 v1(3.751,100.275)
DB2: D1.1 JP5.17 R7.2 U1.12 | length 133.2
  Top Layer w0.3: v2(3.351,95.324) 3.627,95.6 8,95.6 9.8,97.4 37.782,97.4 U1.12@40.513,100.131 ; v2(4.051,58.115) 4.051,58.1 4.151,58 D1.1@4.151,56.264 ; D1.1@4.114,56.4 D1.1@4.15,56.364 ; R7.2@43.348,51.7 R7.2@44,51.7
  Top Layer w0.4: v2(4.051,51.763) 3.988,51.763 5.051,50.7 39.86,50.7 40.86,51.7 R7.2@44,51.7
  Top Layer w0.5: U1.12@40.513,100.131 40.67,100.288 JP5.17@40.67,106.3
  Bottom Layer w0.3: v2(3.351,95.324) 2.801,94.774 2.801,61.616 4.051,60.365 v2(4.051,51.763)
DB3: JP5.19 R4.2 U1.13 | length 154.7
  Top Layer w0.3: v1(41.75,42.65) 41.807,42.707 R4.2@44.063,42.707 ; v1(41.75,54) 64.4,54 67.1,56.7 81.7,56.7 v1(81.75,56.65)
  Top Layer w0.5: U1.13@43.053,100.131 43.21,100.288 JP5.19@43.21,106.3
  Bottom Layer w0.3: v1(41.75,42.65) v1(41.75,54) ; JP5.19@43.15,106.35 43.2,106.3 JP5.19@43.21,106.3 48.65,106.3 49.85,107.5 51.15,107.5 51.9,106.75 64.8,106.75 70.8,100.75 79.4,100.75 80.75,102.1 84.897,102.1 ; 80.85,64.45 80.85,60.9 81.75,60 v1(81.75,56.65) ; 80.99,64.59 85.522,69.121 85.522,99.025 85.522,101.476 84.897,102.1 ; 84.721,102.1 84.897,102.1
DB4: JP5.20 Q5.3 R6.2 U1.14 | length 151
  Top Layer w0.3: v1(68.35,42.9) 68.4,42.85 70.05,42.85 71.9,44.7 74.55,44.7 76.35,42.9 76.35,42.652 Q5.3@76.35,42.6 ; v1(68.4,47.9) 86.15,47.9 ; 85.171,47.9 86.122,47.9 v2(86.722,47.3)
  Top Layer w0.4: JP5.20@43.19,108.84 JP5.20@43.21,108.84 ; JP5.20@43.2,108.83 JP5.20@43.21,108.84 ; U1.14@45.593,100.131 45.593,107.757 44.51,108.84 JP5.20@43.21,108.84
  Bottom Layer w0.3: v1(68.35,42.9) 68.4,42.95 v1(68.4,47.9) ; 78.8,102.2 80.3,103.7 85.822,103.7 ; 79.734,103.133 78.626,102.026 71.468,102.026 64.766,108.727 49.112,108.727 48.74,109.1 JP5.20@43.47,109.1 ; 84.771,103.7 85.798,103.7 87.022,102.476 87.022,47.612 86.722,47.312 v2(86.722,47.3) ; JP5.20@43.47,109.1 JP5.20@43.21,108.84 JP5.20@43.47,109.1
DB5: JP5.18 U1.15 | length 15.9
  Top Layer w0.4: U1.15@48.133,100.131 48.133,107.833 v1(48.15,107.85)
  Bottom Layer w0.3: JP5.18@40.6,108.85 40.61,108.84 JP5.18@40.67,108.84 41.933,107.577 47.877,107.577 v1(48.15,107.85)
DB6: JP5.16 U1.16 | length 21.9
  Top Layer w0.4: v1(50.45,106.2) 50.673,105.977 U1.16@50.673,100.131 50.654,100.15 U1.16@50.6,100.15
  Bottom Layer w0.3: JP5.16@38.13,108.84 39.4,107.57 39.4,105.65 40.15,104.9 49.15,104.9 v1(50.45,106.2)
DB7: JP5.14 U1.17 | length 27.2
  Top Layer w0.3: 34.25,105.477 34.25,106.969 34.259,106.977
  Top Layer w0.4: v1(34.25,102.65) 34.25,105.477 ; 34.259,106.977 34.259,107.509 JP5.14@35.59,108.84
  Bottom Layer w0.4: v1(34.25,102.65) 34.75,103.15 50.194,103.15 U1.17@53.213,100.131
DT1: 
DT2: 
DT3: 
DT4: 
DT5: 
GND_P: 
GND_USB: C1.1 C3.1 C4.1 J1.5 J1.6@38.653,82.95 U2.7 U2.18 U2.21 U2.25 U2.26 U3.2 U3.8 | length 12.7
  Top Layer w0.3: C4.1@19.305,68.767 19.536,68.998 23.825,68.998 v2(24.356,68.467) ; v2@27.557,71.218 v2(27.607,71.218) ; v2@27.707,68.367 27.726,68.349 U2.21@29.261,68.349 ; U2.26@29.207,71.618 28.007,71.618 v2(27.607,71.218) ; U2.18@29.261,66.398 30.926,66.398 v2@31.258,66.067 ; U2.25@29.261,70.948 27.876,70.948 v2(27.607,71.218)
  Bottom Layer w0.3: v2@27.557,71.218 v2(27.607,71.218)
  other v2: 31.097,66.317 27.557,68.367
  other v4: 26.657,73.018 35.759,74.119 26.997,78.77
NetA1_1: 
NetA1_2: 
NetBT2_1: 
NetBT2_2: 
NetBT700_1: 
NetC1_2: C1.2 R9.2 U2.20 U3.1 U3.7 U5.1 | length 41
  Top Layer w0.3: U3.1@24.88,77.326 28.301,77.326 C1.2@29.707,75.919 ; U3.7@24.88,84.946 28.833,84.946 v2@28.857,84.921 ; v2(27.057,90.223) U5.1@28.807,90.223 ; U2.20@29.261,67.698 32.69,67.698 R9.2@32.958,67.967 ; C1.2@29.695,75.812 30.823,74.684 31.058,74.449 31.058,67.717 ; v2@30.858,74.719 v2(31.258,75.119)
  Bottom Layer w0.3: v2(27.057,90.223) 27.057,87.15 28.857,85.35 28.857,77.87 31.258,75.469 v2(31.258,75.119)
  other v2: 28.857,84.971
NetC2_1: C2.1 C5.1 C22.2 JP5.1 JP5.2 Q3.2 R11.2 S1.1 S2.1 S3.1 S4.1 S5.1 S6.2 U1.1 U1.20 U4.2 | length 12.5
  Bottom Layer w0.6: S5.1@54.9,11.5 S5.1@54.9,24 S5.1@54.9,24.005
  other v1: 70.518,50.463 68.017,52.913 35.509,55.4 30.55,55.414 20.45,55.464 25.506,55.5 50.45,56.614 60.45,56.614 55.514,56.664 40.51,56.7 45.511,56.764 28.007,57.9 48.062,57.9 58.015,57.9 23.006,57.965 33.008,57.965 38.01,57.965 43.011,57.965 53.013,57.965 63.016,57.965 8.102,58.665 8.002,62.966 83.021,69.768 83.021,74.8 83.021,79.9 83.021,84.9 83.05,89.923 5.501,90.473 8.002,92.9 83.021,94.8 70.518,99.025 75.519,99.025 66.017,99.9 63.166,102.3 56.214,102.8 60.35,104.726 53.55,104.876 83.021,105.427 80.47,107.977 85.472,107.977 67.667,108.5
NetC2_2: C2.2 Q3.1 R8.1 R11.1 | length 17.9
  Top Layer w0.4: R8.1@7.006,53.542 10.224,53.542 10.253,53.513 C2.2@10.253,56.464 ; v2(10.253,58.565) 10.262,58.556 C2.2@10.262,56.329 ; Q3.1@17.554,56.514 v2(17.554,58.6)
  Bottom Layer w0.3: v2(10.253,58.565) 17.519,58.565 v2(17.554,58.6)
NetC3_2: C3.2 J1.1 R9.1 | length 11.5
  Top Layer w0.3: C3.2@28.957,78.87 29.857,78.87 31.858,76.869 33.358,76.869 v2(33.358,76.269) ; R9.1@32.902,70.78 32.908,70.786 v2(32.908,71.618)
  Bottom Layer w0.3: v2(32.908,71.618) 32.908,71.718 33.358,72.168 v2(33.358,76.269)
NetC4_2: C4.2 U2.4 U2.17 | length 14.7
  Top Layer w0.3: C4.2@19.255,71.568 20.255,71.568 20.875,70.948 23.437,70.948 23.906,71.418 25.006,71.418 26.107,70.318 26.107,67.167 27.525,65.748 U2.17@29.261,65.748
NetC5_2: C5.2 JP9.1 JP9.2 Q5.1 U4.1 | length 23.9
  Top Layer w0.3: Q5.1@78.55,41.7 78.576,41.675 79.125,41.125 U4.1@79.125,38.3 ; Q5.1@78.602,41.702 Q5.1@78.649,41.702 ; v1@79.17,39.96 79.93,39.96 80.737,40.767 C5.2@82.81,40.767
  Top Layer w0.5: v1(80.57,48.862) 80.582,48.85 83.5,48.85 84.3,49.65 84.3,49.663 84.3,52.203 JP9.2@84.3,52.24
  Bottom Layer w0.5: v1(79.125,39.9) 79.125,47.417 v1(80.57,48.862)
NetC11_1: 
NetC11_2: 
NetC12_2: 
NetC14_2: 
NetC21_1: 
NetC22_1: C22.1 JP5.3 JP5.4 R2.2 R21.2 U1.2 U1.19 U4.5 | length 252.8
  Top Layer w0.3: U4.5@81.25,38.35 81.275,38.325 U4.5@81.275,38.3 82.25,38.3 83.25,37.3 83.25,34.65 82,33.4 82,31.757 82,31.75 82.003,31.747 82.8,30.95 82.893,30.858 v2(85.422,30.858)
  Top Layer w0.4: R21.2@25.494,52.712 38.659,52.712 41.11,55.164 64.216,55.164 66.652,57.6 80.635,57.6 80.9,57.865 v1(85.472,57.865) ; v1@58.293,109.728 v1@58.315,109.728
  Top Layer w0.5: R2.2@17.404,105.177 18.181,104.4 19.2,104.4 20.99,104.4 JP5.3@22.89,106.3
  Top Layer w1: U1.19@58.293,100.131 v1@58.293,107.9 ; 58.293,105.827 58.293,109.706 v1@58.315,109.728
  Bottom Layer w0.3: v1(58.315,107.727) 64.716,107.727 71.043,101.4 74.919,101.4 ; 71.1,101.4 79,101.4 80.3,102.7 85.422,102.7 ; 84.921,102.7 85.572,102.7 86.1,102.171 86.1,57.843 86.1,49.262 ; v2(85.422,30.858) 87.072,32.508 87.072,44.911 ; 86.1,50.063 86.1,48.791 85.221,47.912 85.221,46.812 87.072,44.961 87.072,43.911
  Bottom Layer w0.6: JP5.4@22.89,108.84 24.278,110.228 57.815,110.228 v1@58.315,109.728
  Bottom Layer w1: U1.2@15.113,100.131 15.113,100.713 16.75,102.35 19.4,102.35 22.89,105.84 JP5.3@22.89,106.3 JP5.4@22.89,108.84
  other v1: 58.293,109.678
NetC23_1: 
NetC33_1: 
NetC35_2: 
NetC36_2: 
NetC50_2: 
NetC51_2: 
NetC52_2: 
NetC53_2: 
NetC61_1: 
NetC61_2: 
NetC62_2: 
NetC63_2: 
NetC66_1: 
NetC302_1: C302.1 C303.1 C304.1 C310.1 J301.8 X306.1 | length 50.5
  Top Layer w0.5: C310.1@61.816,81.52 63.716,83.421 J301.8@66.969,83.421 ; J301.8@66.867,83.421 68.217,84.771 74.319,84.771 75.469,83.621 75.469,73.919 75.466,73.916 C303.1@72.169,73.916 ; J301.8@66.969,82.761 66.969,83.523 ; v1(68.717,65.466) 73.819,65.466 X306.1@75.069,64.216 ; v1(68.717,70.918) 69.618,71.818 70.418,71.818 72.342,73.743 72.468,73.869 C303.1@72.518,73.869 ; C304.1@72.169,82.416 72.169,84.57 ; 72.918,84.771 C302.1@72.918,86.472
  Bottom Layer w0.5: v1(68.717,65.466) v1(68.717,70.918)
NetC302_2: C302.2 C303.2 C304.2 C310.2 J301.4 J301.5 J301.9 J301.12 R301.2 R302.1 R303.2 R304.1 X301.1 | length 90.8
  Top Layer w0.5: J301.9@53.169,72.006 53.169,66.311 55.064,64.416 65.216,64.416 66.117,65.316 66.117,69.217 ; C310.2@61.816,78.72 64.65,78.72 65.689,77.681 J301.4@66.969,77.681 68.279,77.681 68.767,78.17 v1(72.218,78.17) ; J301.5@64.816,78.47 J301.5@64.816,78.554 ; v2(68.317,86.372) C302.2@69.968,86.372 ; v2(68.717,83.421) 69.468,82.671 69.468,74.519 66.067,71.118 66.067,69.067 72.768,69.067 75.069,66.767 X301.1@75.069,66.716 ; C304.2@72.218,79.72 72.218,79.616 72.218,76.716 72.218,76.569 C303.2@72.268,76.519
  Bottom Layer w0.4: v2@67.967,86.472 67.967,84.171 v2(68.717,83.421)
  Bottom Layer w0.5: J301.9@53.169,72.006 53.169,75.525 55.114,77.47 55.114,82.621 54.689,83.045 J301.12@54.689,84.626 ; R304.1@70.863,79.604 70.984,79.604 70.984,79.404 v1@72.193,78.195 ; R301.2@70.918,76.719 70.918,76.919 73.576,79.577 R303.2@73.576,79.628 ; v1(72.218,78.17) 73.576,76.812 R302.1@73.576,76.728
NetC500_2: 
NetC502_1: 
NetC502_2: 
NetC505_1: 
NetC505_2: 
NetC508_1: 
NetC510_1: 
NetC511_1: 
NetC511_2: 
NetC512_2: 
NetC513_2: 
NetC514_1: 
NetC516_1: 
NetC516_2: 
NetC517_1: 
NetC700_1: 
NetC700_2: 
NetC701_1: 
NetC702_1: 
NetC704_2: 
NetC705_2: 
NetC706_1: 
NetC707_1: 
NetC707_2: 
NetC709_1: 
NetC709_2: 
NetC710_1: 
NetC713_1: 
NetC714_1: 
NetC715_1: 
NetD1_2: D1.2 R8.2 | length 3.9
  Top Layer w0.3: R8.2@4.201,53.5 4.201,53.542 4.201,53.565 6.931,56.295 D1.2@6.945,56.295
NetD3_1: D3.1 JP5.8 | length 106.5
  Top Layer w0.5: v1@80.72,55.714 80.77,55.659 81.938,54.363 D3.1@81.938,53.805
  Bottom Layer w0.3: JP5.8@27.97,108.84 29.25,107.56 29.25,102.8 29.1,102.65 29.1,97.9 29.7,97.3 79.1,97.3 79.95,96.45 79.95,60.65 80.6,60 80.6,55.7 80.653,55.647 80.67,55.664 v1@80.72,55.714
  other v1: 80.72,55.614
NetD3_2: D3.2 JP9.3 S6.1 | length 13.7
  Top Layer w0.5: S6.1@72.809,50.101 S6.1@78.809,50.101 80.509,50.101 D3.2@81.17,50.763 ; D3.2@81.338,50.955 81.338,51.038 82.9,52.6 82.9,53.38 84.292,54.772 JP9.3@84.3,54.78
NetD5_1: 
NetD20_2: 
NetD500_1: 
NetD500_2: 
NetD501_1: 
NetD503_1: 
NetD505_1: 
NetD505_2: 
NetD506_1: 
NetD700_1: 
NetD701_1: 
NetD702_1: 
NetD703_2: 
NetD704_1: 
NetD705_1: 
NetD706_1: 
NetDS1_1: DS1.1 R21.1 | length 3.8
  Top Layer w0.4: DS1.1@19.185,51.936 20.278,51.936 21.054,52.712 R21.1@22.694,52.712